# Altium PCB FF.PcbDoc
Units mil, origin at the board's own origin, x right, y up, seen from the top; angles counter-clockwise.
Board outline 3000 x 3000 mil, 2 copper layers (Top Layer, Bottom Layer); 22 components, 26 nets, 106 pads, 0 vias.
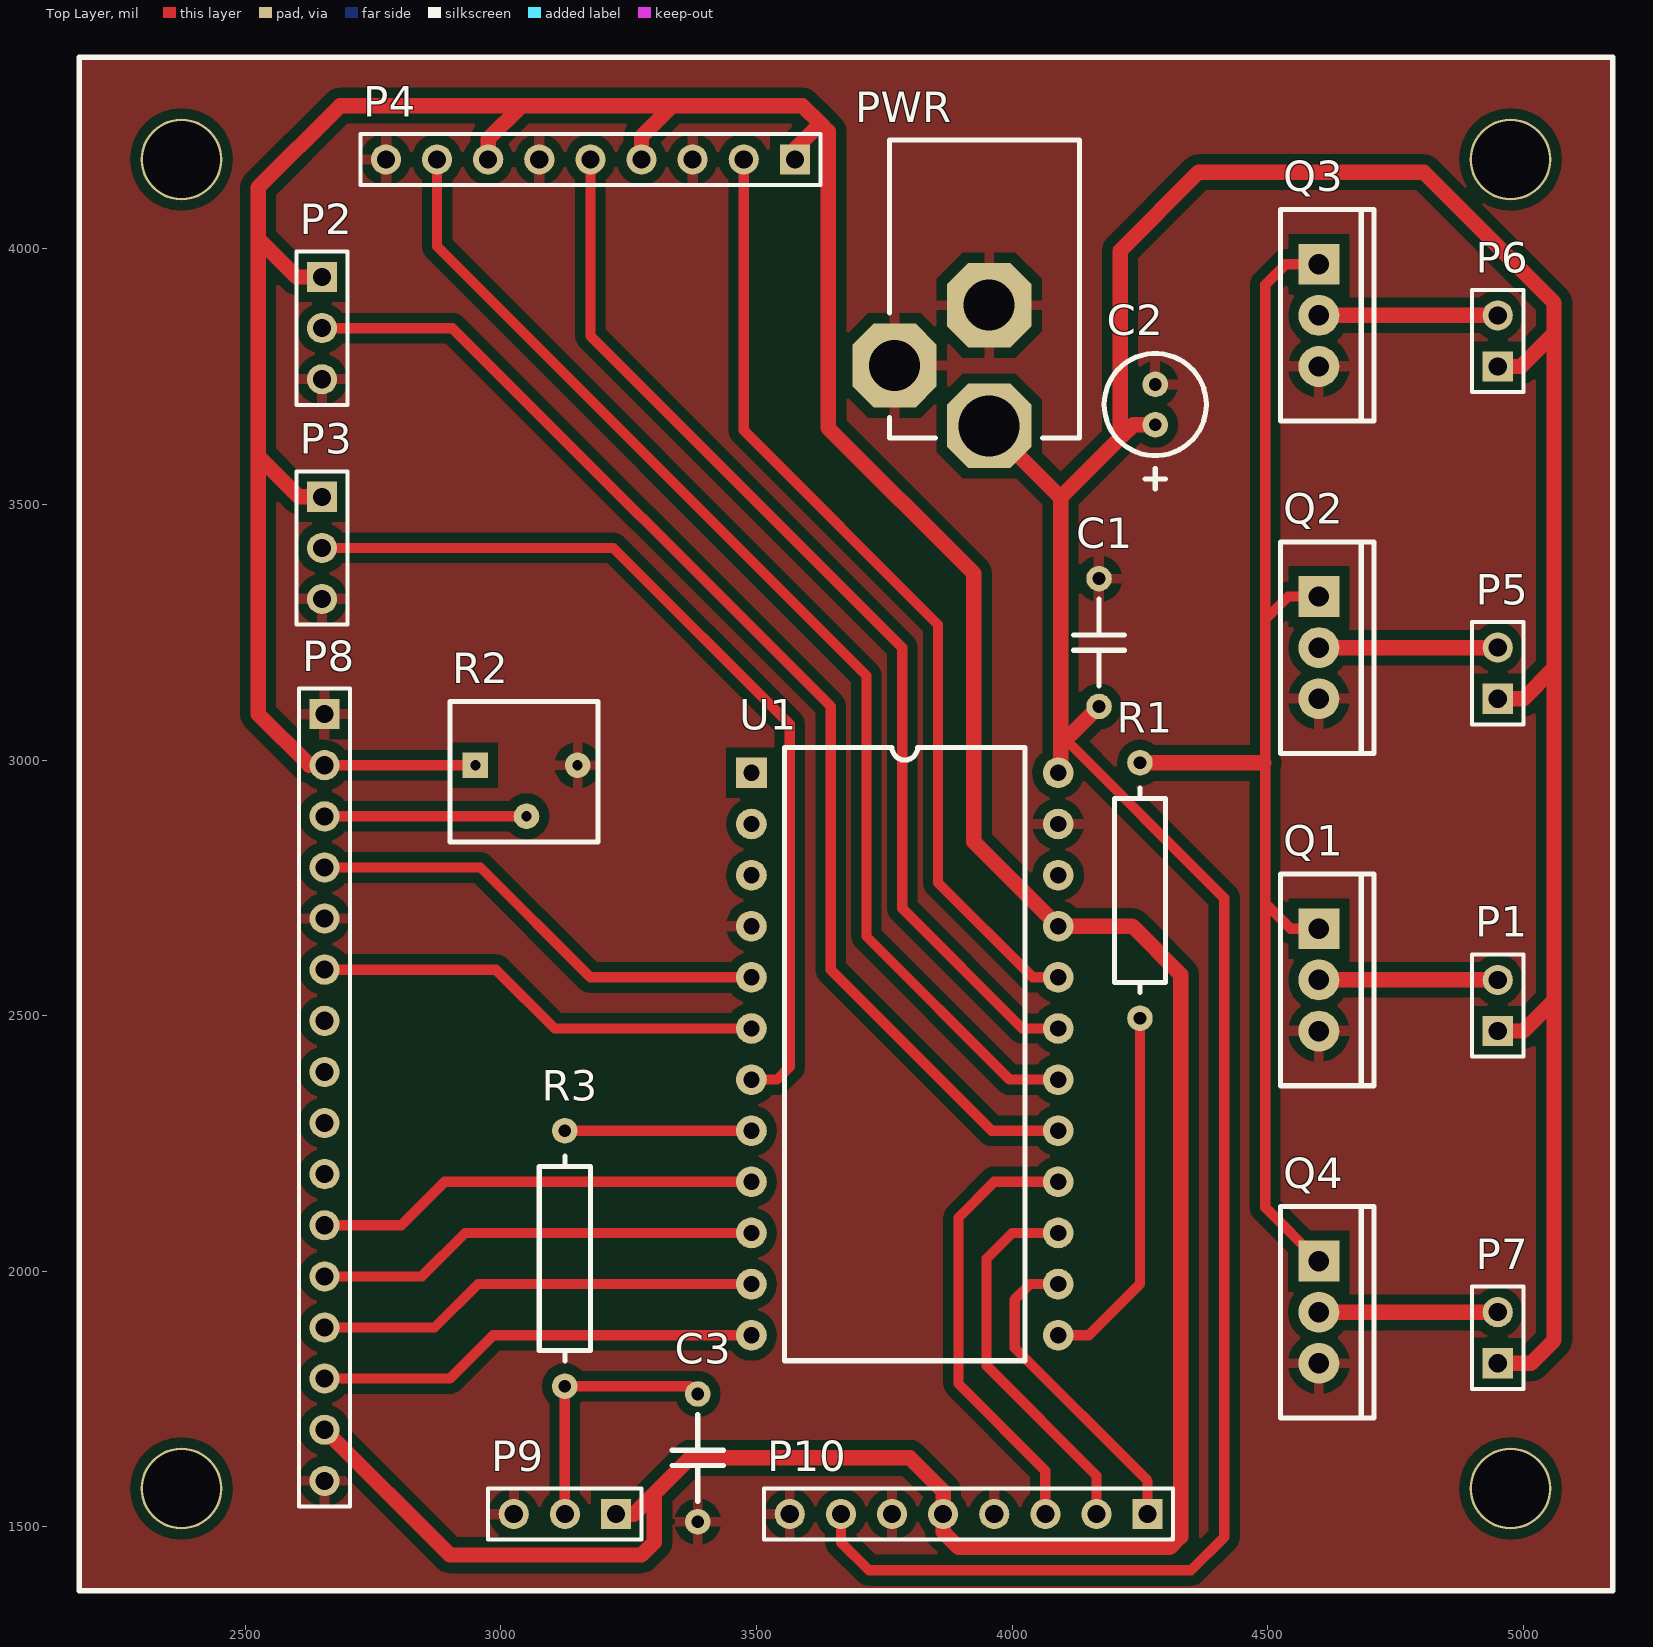
[diagram p0: Top Layer view]
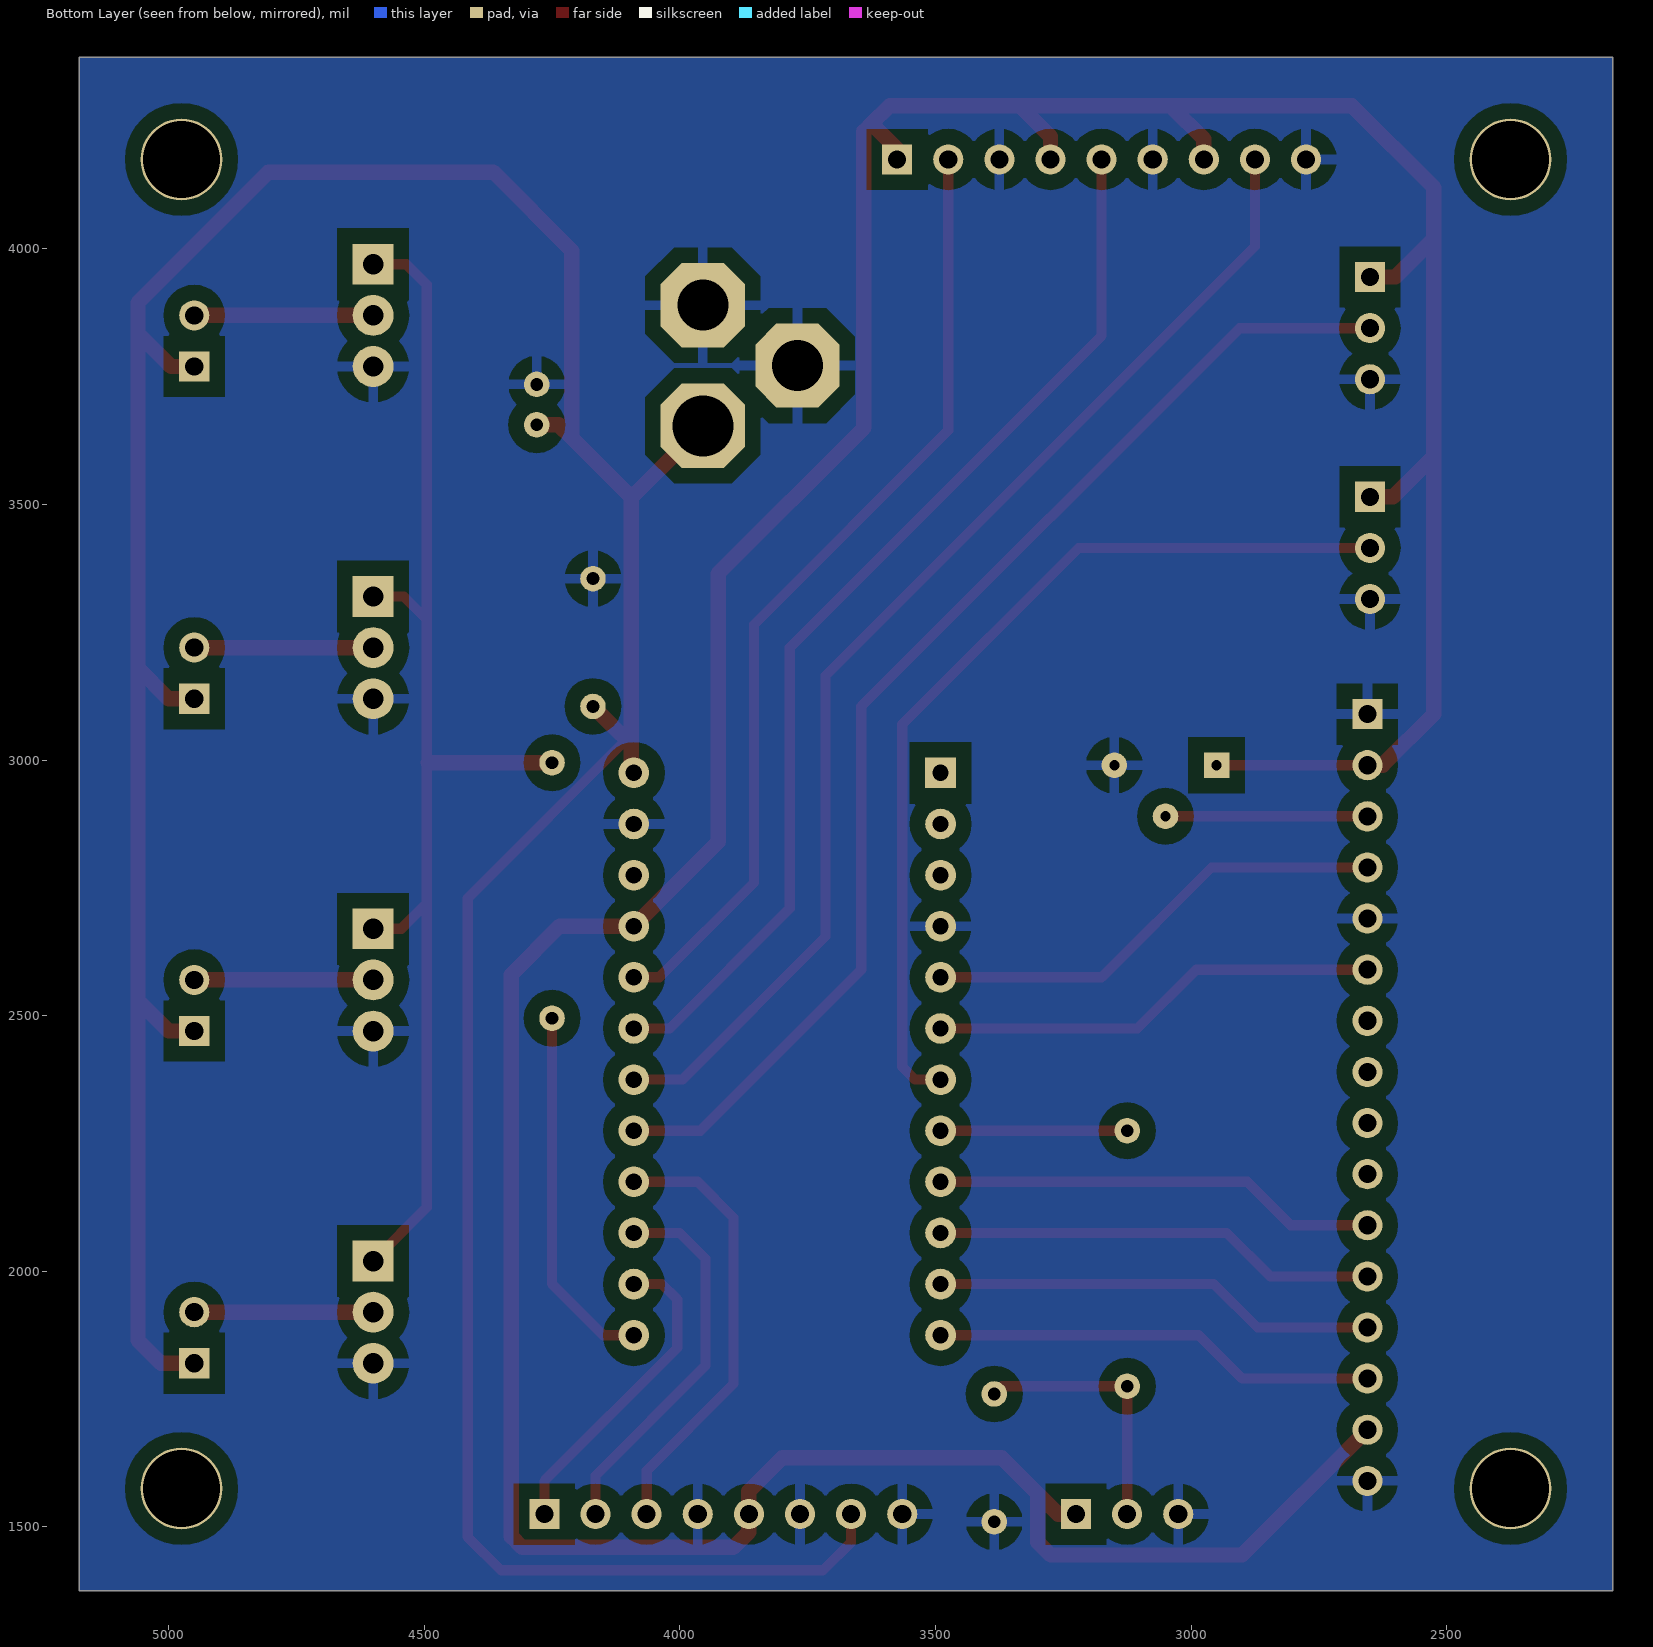
[diagram p1: Bottom Layer view, seen from below]

## Layer stack, top to bottom
Top Layer: signal copper 1.4
Dielectric: dielectric 12.6, FR-4, Dk 4.8
Bottom Layer: signal copper 1.4

## Board outline
2175,1375 2175,4375 5175,4375 5175,1375

## Design rules (kind name [scope] priority, off if disabled: settings)
Clearance [All] p1: gap=20
PolygonConnect [All] p1: connectstyle=Relief reliefconductorwidth=20 reliefentries=4 polygonreliefangle="90 Angle"
RoutingVias [All] p1: holewidth=28 width=50 viastyle="Through Hole" minholewidth=28 minwidth=50 maxholewidth=28 maxwidth=50
SilkscreenOverComponentPads [All] p1: minsilkscreentomaskgap=10
SolderMaskExpansion [All] p1: expansion=4
Width [All] p1: maxlimit=30 minlimit=10 preferedwidth=20
27 further rules are at their usual default settings.

## Components (designator, comment, footprint, x,y, rotation, side; value= is the part's Value field where it differs from the comment)
C1 "Capacitor" "Cap Axial" 4170,3355 r270 top
C2 "Capacitor" "Cap Radial-Can 200" 4280,3735 r270 top
C3 "Capacitor" "Cap Axial" 3385,1760 r270 top
P1 "Fan" HDR1X2 4950,2470 r90 top
P2 "Pot" HDR1X3 2650,3945 r270 top
P3 "Btn" HDR1X3 2650,3515 r270 top
P4 "Temp" HDR1X9 3575,4175 r180 top
P5 "Fan" HDR1X2 4950,3120 r90 top
P6 "Fan" HDR1X2 4950,3770 r90 top
P7 "Fan" HDR1X2 4950,1820 r90 top
P8 "LCD" HDR1X16 2655,3090 r270 top
P9 "Motor" HDR1X3 3225,1525 r180 top
P10 "Header 8" HDR1X8 4265,1525 r180 top
PWR "3.5mm Power Jack" "3.5mm Power Jack" 3955,3890 r270 top
Q1 "NMOS" TO-220 4600,2670 r0 top
Q2 "NMOS" TO-220 4600,3320 r0 top
Q3 "NMOS" TO-220 4600,3970 r0 top
Q4 "NMOS" TO-220 4600,2020 r0 top
R1 "Resistor" "Res Axial 1/2W" 4250,2495 r90 top
R2 "Trimmer Pot" T73YP103KT20 2950,2990 r0 top
R3 "Resistor" "Res Axial 1/2W" 3125,2275 r270 top
U1 "Arduino_Socket" Arduino_Socket 3490,2975 r0 top

## Footprints (in the part's own frame and the unit in brackets; to place one, negate y for a bottom-side part, rotate by r counter-clockwise, add the part's x,y. Pads: shape width x height; smd on the part's side, far side on the other; paste and mask are expansions set on the pad)
"3.5mm Power Jack" [mil]
  oct 165x165 hole 119: 1(236.22,0)
  oct 165x165 hole 100: 2(0,0) 3(118.11,-185.04)
  silkscreen extent -323,-195 260,177
Arduino_Socket [mil]
  rect 60x60 hole 32: 1(0,0)
  round 60 hole 32: 2(0,-100) 3(0,-200) 4(0,-300) 5(0,-400) 6(0,-500) 7(0,-600) 8(0,-700) 9(0,-800) 10(0,-900) 11(0,-1000) 12(0,-1100) 13(600,-1100) 14(600,-1000) 15(600,-900) 16(600,-800) 17(600,-700) 18(600,-600) 19(600,-500) 20(600,-400) 21(600,-300) 22(600,-200) 23(600,-100) 24(600,0)
  silkscreen extent 65,-1150 535,50
"Cap Axial" [mil] "Ceramic Axial Capacitor"
  round 50 hole 25: 0(250,0) 1(0,0)
  silkscreen extent 40,-50 210,50
"Cap Radial-Can 200" [mil] "Aluminum Radial-Can Polarized Capacitor, 200mil Dia."
  round 50 hole 25: 0(79,0) 1(0,0)
  silkscreen extent -60,-100 205,100
HDR1X2 [mm] "Connector; Header; 2 Position"
  rect 1.5x1.5 hole 0.9: 1(0,0)
  round 1.5 hole 0.9: 2(2.54,0)
  silkscreen extent -1.27,-1.27 3.81,1.27
HDR1X3 [mm] "Connector; Header; 3 Position"
  rect 1.5x1.5 hole 0.9: 1(0,0)
  round 1.5 hole 0.9: 2(2.54,0) 3(5.08,0)
  silkscreen extent -1.27,-1.27 6.35,1.27
HDR1X8 [mm] "Connector; Header; 8 Position"
  rect 1.5x1.5 hole 0.9: 1(0,0)
  round 1.5 hole 0.9: 2(2.54,0) 3(5.08,0) 4(7.62,0) 5(10.16,0) 6(12.7,0) 7(15.24,0) 8(17.78,0)
  silkscreen extent -1.27,-1.27 19.05,1.27
HDR1X9 [mm] "Connector; Header; 9 Position"
  rect 1.5x1.5 hole 0.9: 1(0,0)
  round 1.5 hole 0.9: 2(2.54,0) 3(5.08,0) 4(7.62,0) 5(10.16,0) 6(12.7,0) 7(15.24,0) 8(17.78,0) 9(20.32,0)
  silkscreen extent -1.27,-1.27 21.59,1.27
HDR1X16 [mm] "Connector; Header; 16 Position"
  rect 1.5x1.5 hole 0.9: 1(0,0)
  round 1.5 hole 0.9: 2(2.54,0) 3(5.08,0) 4(7.62,0) 5(10.16,0) 6(12.7,0) 7(15.24,0) 8(17.78,0) 9(20.32,0) 10(22.86,0) 11(25.4,0) 12(27.94,0) 13(30.48,0) 14(33.02,0) 15(35.56,0) 16(38.1,0)
  silkscreen extent -1.27,-1.27 39.37,1.27
"Res Axial 1/2W" [mil]
  round 50 hole 25: 1(0,0) 2(500,0)
  silkscreen extent 50,-50 450,50
T73YP103KT20 [mil]
  rect 50x50 hole 20: 0(0,0)
  round 50 hole 20: 1(200,0) 2(100,-100)
  silkscreen extent -50,-150 240,125
TO-220 [mil]
  rect 80x80 hole 40: 1(0,0)
  round 80 hole 40: 2(0,-100) 3(0,-200)
  silkscreen extent -75,-307 108,107

## Part data
C1 C3: "Ceramic Capacitor"
C2: library part "Capacitor Polar", "Electrolytic Capacitor"
P1 P5 P6 P7: library part "Header 2", "Header, 2-Pin"
P2 P3 P9: library part "Header 3", "Header, 3-Pin"
P4: library part "Header 9", "Header, 9-Pin"
P8: library part "Header 16", "Header, 16-Pin"
P10: "Header, 8-Pin"

## Free pads (board coordinates)
  round 160 hole 150: 0(2375,1575) 0(2375,4175) 0(4975,1575) 0(4975,4175)

## Nets (pads, with @x,y where several pads share a name; then routed paths per layer and width w, separated by ;. In a path a pad name is that pad's centre, name@x,y a point inside that pad or via, vN(x,y) a via of type N, cw(c..) or ccw(c..) an arc to the next point about the centre after c; other vN are vias at no path point)
12V: C1.0 C2.0 P1.1 P5.1 P6.1 P7.1 P10.7 PWR.1 U1.24 | length 7592.4
  Top Layer w20: P10.7 3665,1470 3720,1415 4350,1415 4415,1480 4415,2730 4095,3050 ; U1.24@4090,2980 U1.24 U1.24@4095,2980
  Top Layer w30: PWR.1 4095,3513.78 ; U1.24@4095,2980 4095,3050 ; C1.0 4115,3050 4095,3050 ; C2.0 4237.22,3656 4211.22,3630 ; P7.1 5015,1820 5060,1865 5060,2530 ; P1.1 5000,2470 5060,2530 ; P5.1 5000,3120 5060,3180 ; P6.1 4995,3770 5060,3835 ; 4095,3050 4095,3513.78 ; 4095,3513.78 4211.22,3630 ; 4211.22,3630 4211.22,3996.22 4365,4150 4805,4150 5060,3895 5060,3835 ; 5060,2530 5060,3180 ; 5060,3180 5060,3835
A0: P2.2 U1.17 | length 2392
  Top Layer w20: P2.2 2905,3845 3645,3105 3645,2590 3960,2275 U1.17
A1: P4.8 U1.18 | length 2358.9
  Top Layer w20: P4.8 2875,4005 3715,3165 3715,2655 3995,2375 U1.18
A2: P4.5 U1.19 | length 2120
  Top Layer w20: P4.5 3175,3830 3785,3220 3785,2710 4020,2475 U1.19
A3: P4.2 U1.20 | length 1884
  Top Layer w20: P4.2 3475,3645 3855,3265 3855,2760 4040,2575 U1.20
D2: P8.4 U1.5 | length 924.1
  Top Layer w20: P8.4 2960,2790 3175,2575 U1.5
D3: P8.6 U1.6 | length 882.6
  Top Layer w20: P8.6 2990,2590 3105,2475 U1.6
D4: P3.2 U1.7 | length 1813.3
  Top Layer w20: P3.2 3220,3415 3565,3070 3565,2400 3540,2375 U1.7
D5: R3.1 U1.8 | length 365
  Top Layer w20: R3.1 U1.8
D6: P8.11 U1.9 | length 870.2
  Top Layer w20: P8.11 2805,2090 2890,2175 U1.9
D7: P8.12 U1.10 | length 870.2
  Top Layer w20: P8.12 2845,1990 2930,2075 U1.10
D8: P8.13 U1.11 | length 870.2
  Top Layer w20: P8.13 2870,1890 2955,1975 U1.11
D9: P8.14 U1.12 | length 870.2
  Top Layer w20: P8.14 2900,1790 2985,1875 U1.12
D10: R1.1 U1.13 | length 721.4
  Top Layer w20: U1.13 4150,1875 4250,1975 R1.1
D11: P10.1 U1.14 | length 625.1
  Top Layer w20: U1.14 4035,1975 4005,1945 4005,1850 4265,1590 P10.1
D12: P10.2 U1.15 | length 749.8
  Top Layer w20: U1.15 4000,2075 3950,2025 3950,1815 4165,1600 P10.2
D13: P10.3 U1.16 | length 874.4
  Top Layer w20: P10.3 4065,1610 3895,1780 3895,2105 3965,2175 U1.16
GND: C1.1 C2.1 C3.0 P2.3 P3.3 P4.3 P4.6 P4.9 P8.1 P8.5 P8.16 P9.3 P10.4 P10.6 P10.8 PWR.2 PWR.3 Q1.3 Q2.3 Q3.3 Q4.3 R2.1 U1.4 U1.23 | length 21.2
  Top Layer w20: U1.4@3475,2690 U1.4
NetC3_1: C3.1 P9.2 R3.2 | length 516.2
  Top Layer w20: P9.2 R3.2 3370,1775 C3.1
NetP1_2: P1.2 Q1.2 | length 350
  Top Layer w30: Q1.2 P1.2
NetP5_2: P5.2 Q2.2 | length 350
  Top Layer w30: Q2.2 P5.2
NetP6_2: P6.2 Q3.2 | length 350
  Top Layer w30: Q3.2 P6.2
NetP7_2: P7.2 Q4.2 | length 350
  Top Layer w30: Q4.2 P7.2
NetP8_3: P8.3 R2.2 | length 395
  Top Layer w20: P8.3 R2.2
NetQ1_1: Q1.1 Q2.1 Q3.1 Q4.1 R1.2 | length 2570.4
  Top Layer w20: 4492.5,2995 4495,2997.5 ; Q4.1 4495,2125 4495,2720 ; Q1.1 4545,2670 4495,2720 ; Q2.1 4540,3320 4495,3275 ; Q3.1 4535,3970 4495,3930 4495,3275 ; 4495,2720 4495,2997.5 ; 4495,2997.5 4495,3275
  Top Layer w30: R1.2 4492.5,2995
VCC: P2.1 P3.1 P4.1 P4.4 P4.7 P8.2 P8.15 P9.1 P10.5 R2.0 U1.21 | length 8609.6
  Top Layer w20: P8.2 R2.0
  Top Layer w30: 2525,3600 2525,4020 ; P3.1 2605,3515 2525,3595 2525,3090 2625,2990 P8.2 ; P2.1 2600,3945 2525,4020 ; P8.15 2900,1445 3275,1445 3300,1470 3300,1565 ; P4.7 2975,4215 3040,4280 ; P9.1 3260,1525 3300,1565 ; P4.4 3275,4220 3335,4280 ; P4.1 3575,4195 3625,4245 ; 2525,4020 2525,4120 2685,4280 3040,4280 ; 3040,4280 3335,4280 ; 3300,1565 3370,1635 3800,1635 3865,1570 P10.5 3865,1490 3895,1460 4308.55,1460 4329.53,1480.97 4329.53,2580.47 4235,2675 U1.21 3925,2840 3925,3365 3640,3650 3640,4230 3625,4245 ; 3335,4280 3590,4280 3625,4245
pads on no net: P8.7 P8.8 P8.9 P8.10 U1.1 U1.2 U1.3 U1.22

## Polygon pours and split planes (outlines as drawn)
GND on Top Layer "Top Overlay-No Net" (solid, remove dead copper, pour order 4): 2175,4375 2175,1375 5175,1375 5175,4375 2175,4375
GND on Bottom Layer "Top Overlay-No Net" (solid, remove dead copper, pour order 6): 2175,4375 2175,1375 5175,1375 5175,4375

## Silkscreen, mask and mechanical layers (free items; w line width, h text height)
Top Overlay:
  the board outline again, w10